# Altium PCB PRIMERPROYECTO.PcbDoc
Units mil, origin at the board's own origin, x right, y up, seen from the top; angles counter-clockwise.
Board outline 875 x 575 mil, 2 copper layers (Top Layer, Bottom Layer); 3 components, 3 nets, 6 pads, 0 vias.
Unrouted connection lines stored in the file: 1.
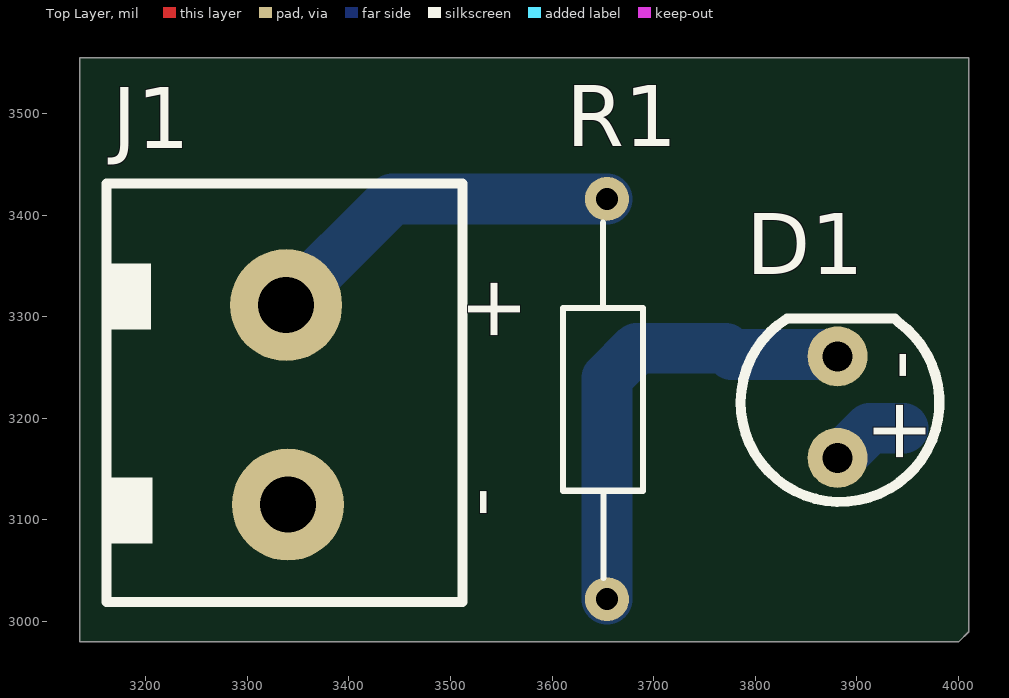
[diagram p0: Top Layer view]
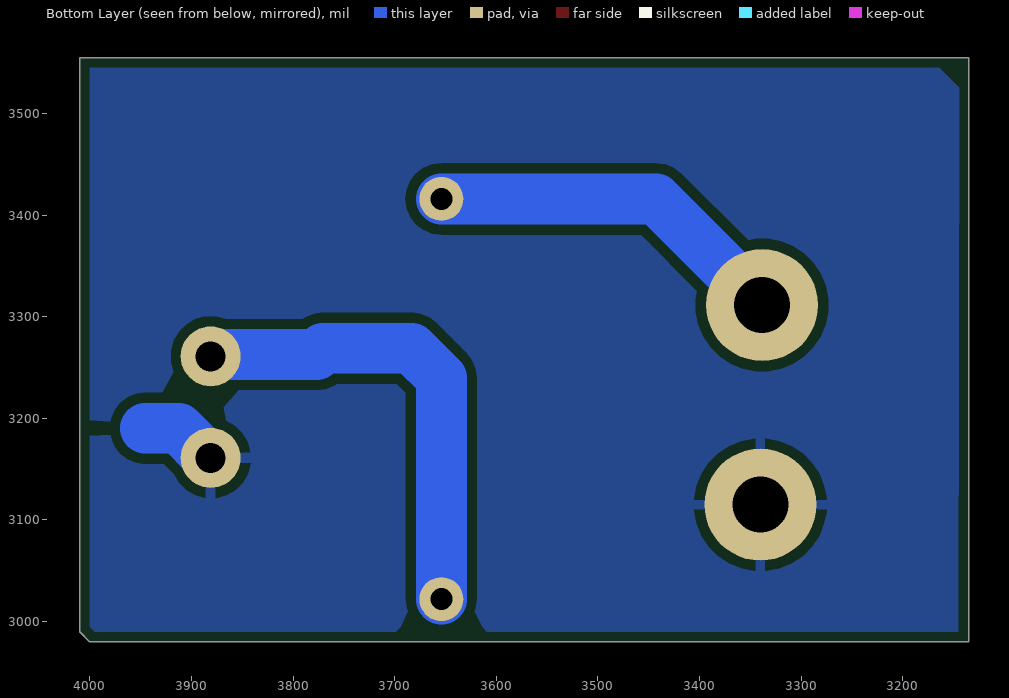
[diagram p1: Bottom Layer view, seen from below]
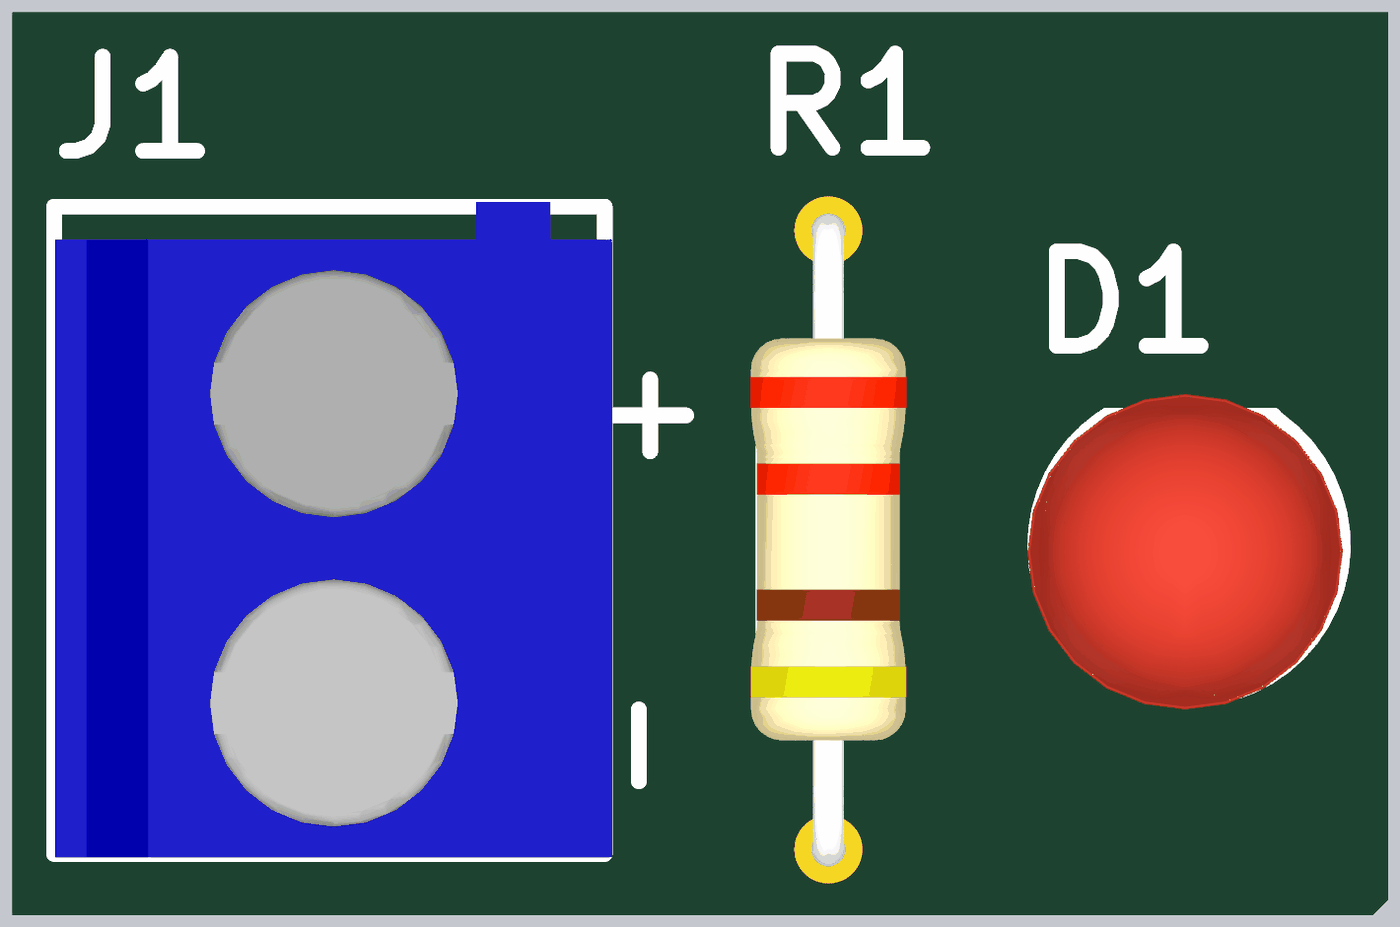
[diagram p2: 3D render of the assembled board from above, using the file's embedded part models]

## Layer stack, top to bottom
Top Solder: solder mask 0.4, Solder Resist, Dk 3.5
Top Layer: signal copper 1.4
Dielectric 1: dielectric 12.6, FR-4, Dk 4.8
Bottom Layer: signal copper 1.4
Bottom Solder: solder mask 0.4, Solder Resist, Dk 3.5

## Board outline
3135,2980 4000,2980 4010,2990 4010,3555 3135,3555

## Design rules (kind name [scope] priority, off if disabled: settings)
Clearance [All] p1: gap=10 ignorepadtopadclearanceinfootprint=FALSE
PolygonConnect [All] p1: connectstyle=Relief reliefconductorwidth=10 reliefentries=4 polygonreliefangle="90 Angle" airgapwidth=10
RoutingVias [All] p1: holewidth=28 width=50 viastyle="Through Hole" minholewidth=28 minwidth=50 maxholewidth=28 maxwidth=50
SolderMaskExpansion [All] p1: expansion=0 istentingtop=FALSE
SupplyNets "Schematic Supply Nets_1" [InNet('GND')] p1: voltage=0.000
SupplyNets "Schematic Supply Nets" [InNet('VCC')] p2: voltage=0.000
Width [All] p1: maxlimit=50 minlimit=20 preferedwidth=40
30 further rules are at their usual default settings.

## Components (designator, comment, footprint, x,y, rotation, side; value= is the part's Value field where it differs from the comment)
D1 "LED_GREEN" LED_GREEN 3885,3210 r90 top
J1 "Bornera" Bornera_azul_2pines 3304,3233 r270 top
R1 "330_R" 330R_0.25W 3650,3230 r270 top

## Footprints (in the part's own frame and the unit in brackets; to place one, negate y for a bottom-side part, rotate by r counter-clockwise, add the part's x,y. Pads: shape width x height; smd on the part's side, far side on the other; paste and mask are expansions set on the pad)
330R_0.25W [mm]
  round 1.1 hole 0.55: 1(-4.724,0.102) 2(5.283,0.102)
  silkscreen extent -4.13,-1 4.75,1, body extent -4.98,-1.16 5.52,1.36, height 3.63
Bornera_azul_2pines [mm]
  round 2.8 hole 1.4: 1(-1.993,0.872) 2(2.997,0.914)
  silkscreen extent -5.03,-3.62 5.43,5.28, body extent -5.11,-3.6 5.49,5.4, height 12.9
LED_GREEN [mm]
  round 1.5 hole 0.75: 1(-1.245,0.102) 2(1.295,0.102)
  silkscreen extent -2.34,-2.44 2.24,2.52, body extent -2.51,-2.45 2.59,2.65, height 8.5

## Part data
J1: library part Bornera_azul_2pines
R1: library part 330R_0.25W

## Nets (pads, with @x,y where several pads share a name; then routed paths per layer and width w, separated by ;. In a path a pad name is that pad's centre, name@x,y a point inside that pad or via, vN(x,y) a via of type N, cw(c..) or ccw(c..) an arc to the next point about the centre after c; other vN are vias at no path point)
GND: D1.1 J1.2 | length 76.7
  Bottom Layer w50: D1.1 3883.45,3161 3912.74,3190.29 3945.53,3190.29
NetD1_2: D1.2 R1.2 | length 460.2
  Bottom Layer w50: R1.2 3654,3239.71 3683.29,3269 3770.55,3269 3776.82,3262.73 3879.27,3262.73 D1.2
VCC: J1.1 R1.1 | length 359
  Bottom Layer w50: J1.1 3442.86,3416 R1.1

## Polygon pours and split planes (outlines as drawn)
GND on Bottom Layer "GND" (solid, pour order 0): 3144.05,3545.64 3144.69,3545 4000,3545 4000,2995 3995,2990 3145,2990

## Silkscreen, mask and mechanical layers (free items; w line width, h text height)
Mechanical 1:
  lines w10: 3135,2980 3155,2980 4000,2980 4010,2990 4010,3555 3135,3555 3135,2980

## Text inside footprints (layer, text, board x,y; h text height)
D1: Top Overlay "+" at 3967.61,3152.61 h60 r90; Top Overlay "-" at 3967.61,3237.67 h60 r90
J1: Top Overlay "+" at 3517.3,3342 h60 r270; Top Overlay "-" at 3510.07,3131.93 h60 r270